# Altium PCB PCB2.PcbDoc
Units mm, origin at the board's own origin, x right, y up, seen from the top; angles counter-clockwise.
Board outline 25 x 13.8 mm, 2 copper layers (Top Layer, Bottom Layer); 27 components, 24 nets, 92 pads, 0 vias.
Unrouted connection lines stored in the file: 4.
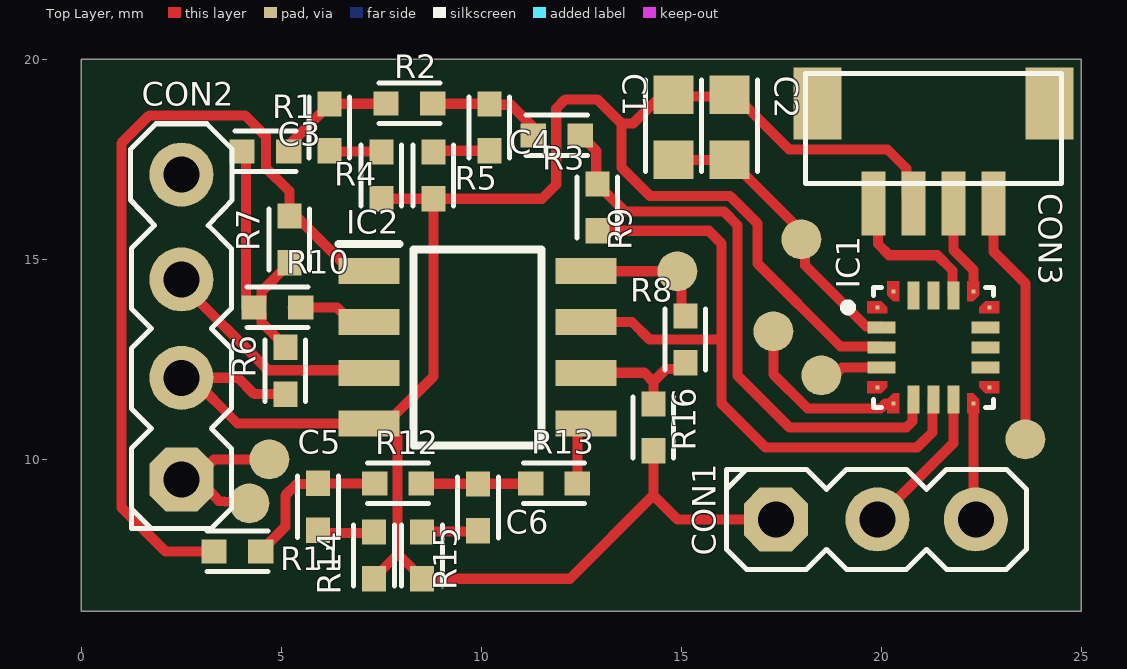
[diagram p0: Top Layer view]
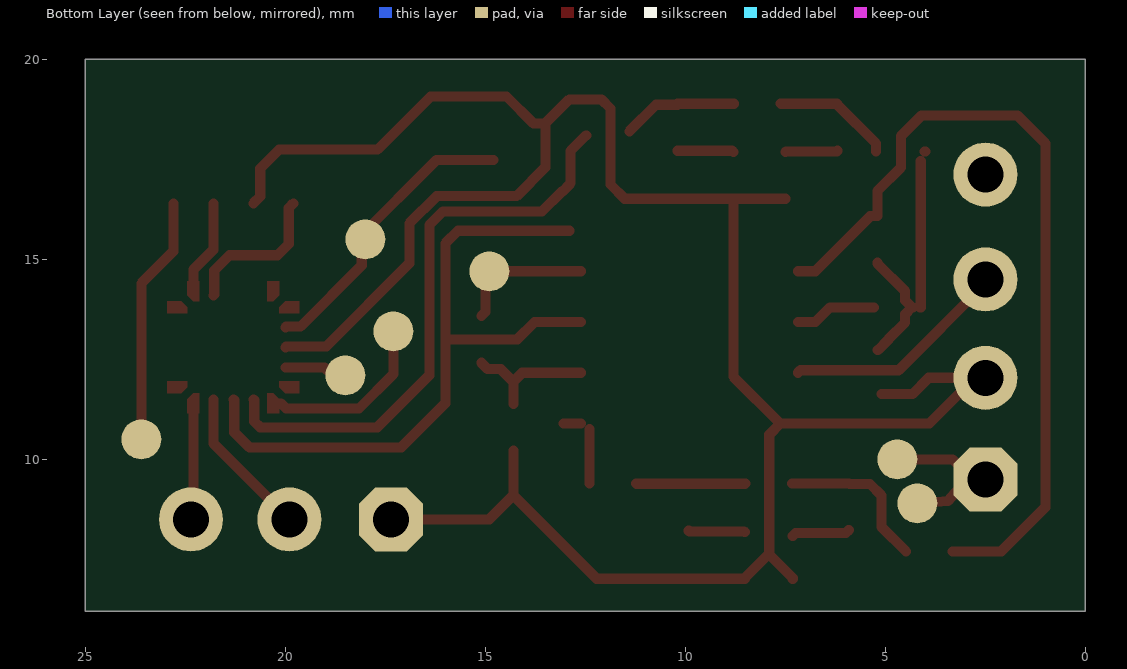
[diagram p1: Bottom Layer view, seen from below]
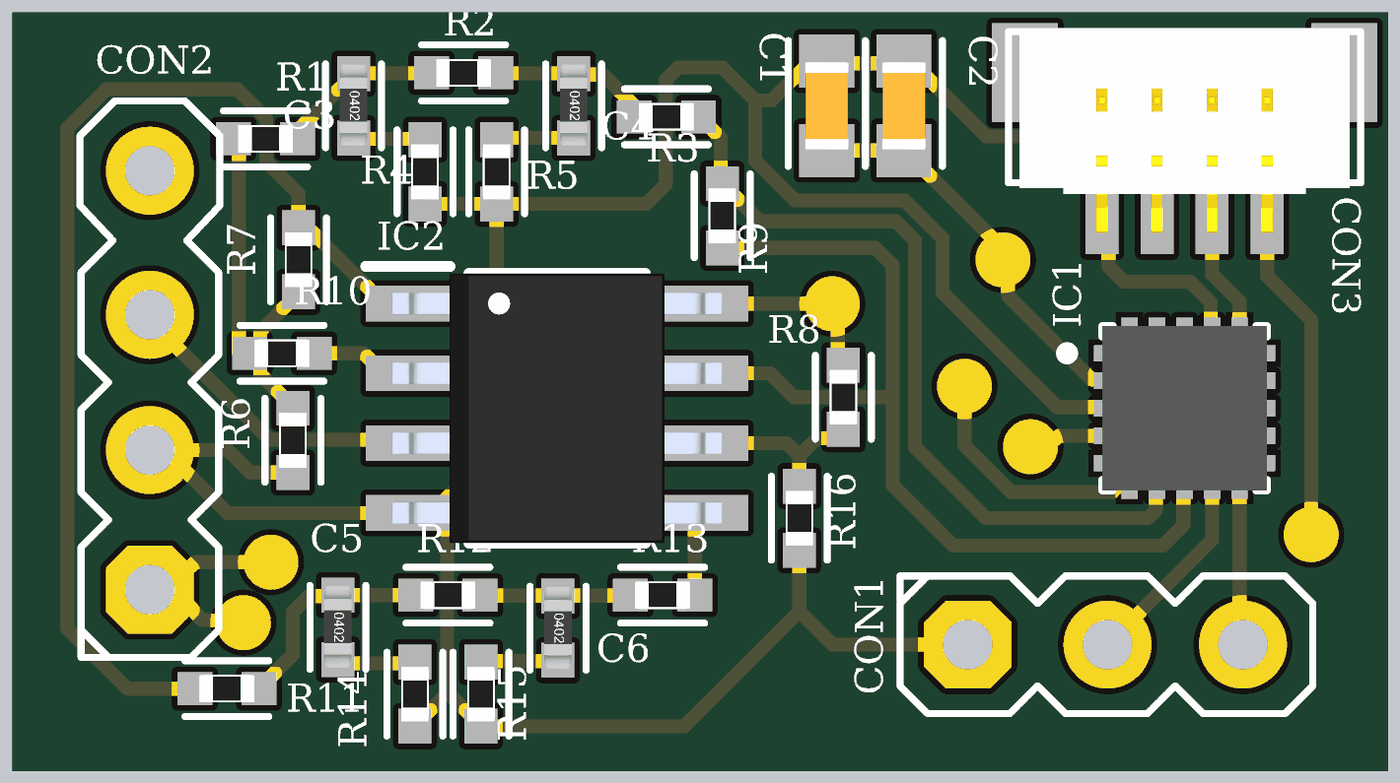
[diagram p2: 3D render of the assembled board from above, using the file's embedded part models]

## Layer stack, top to bottom
Top Solder: solder mask 0.0102, Solder Resist, Dk 3.5
Top Layer: signal copper 0.0356
Dielectric 1: dielectric 0.32, FR-4, Dk 4.8
Bottom Layer: signal copper 0.0356
Bottom Solder: solder mask 0.0102, Solder Resist, Dk 3.5

## Board outline
0,20 0,6.2 25,6.2 25,20

## Design rules (kind name [scope] priority, off if disabled: settings)
BoardOutlineClearance [All] p1: gap=0.8 ignorepadtopadclearanceinfootprint=FALSE
Clearance [All] p1: gap=0.127 ignorepadtopadclearanceinfootprint=TRUE except(0.2: Arc-THPad Track-THPad SMDPad-THPad; 0.254: THPad-Fill THPad-Poly THPad-Region Via-Fill Via-Poly Via-Region; 0.33: Arc-Hole Track-Hole SMDPad-Hole THPad-Hole Via-Hole Fill-Hole Poly-Hole Region-Hole; 0.5: THPad-THPad)
HoleSize [All] p1: absolutevalues=TRUE maxlimit=4 minlimit=0.02 maxpercent=80.000 minpercent=20.000
HoleToHoleClearance [All] p1: gap=0.127 allowstackedmicrovias=TRUE
PlaneClearance [All] p1: clearance=0.3
PlaneConnect PlaneConnect_1 [(HasFootprint('R 2512'))] p1: planeconnectstyle=Relief reliefexpansion=0.508 reliefentries=4 reliefconductorwidth=0.254 reliefairgap=0.254
PlaneConnect [All] p2: planeconnectstyle=Relief reliefexpansion=0.508 reliefentries=4 reliefconductorwidth=0.254 reliefairgap=0.254
PolygonConnect "Polygon Power Connection" [(HasFootprint('DFN 5x6')) OR  (HasFootprint('R 2512')) OR  IsVia OR  HasFootprint('SMD PAD')  OR  (HasFootprint('DJNR60454R5FERROCORE'))  OR  (HasFootprint ('SON50P200X200X80-9N-D')) OR (HasFootprint('SOT230P700X180-4N'))  OR    InNetClass('Power')] p1: connectstyle=Direct reliefconductorwidth=0.254 reliefentries=4 polygonreliefangle="90 Angle" airgapwidth=0.254 // Conection to high power components
PolygonConnect [All] p2: connectstyle=Relief reliefconductorwidth=0.254 reliefentries=4 polygonreliefangle="90 Angle" airgapwidth=0.254
RoutingVias [All] p1: holewidth=0.3 width=0.5 viastyle="Through Hole" minholewidth=0.2 minwidth=0.3 maxholewidth=1 maxwidth=1.27
SilkToSilkClearance [All] p1: silktosilkclearance=0.127
SolderMaskExpansion "Tented Vias" [IsVia] p1: expansion=0.102 istentingtop=TRUE
SolderMaskExpansion [All] p2: expansion=0.102 istentingtop=FALSE
Width [All] p1: maxlimit=1 minlimit=0.127 preferedwidth=0.3 minimp=50.000000 maximp=50.000000 favimp=50.000000
25 further rules are at their usual default settings.

## Classes and differential pairs
component class main: C1 C2 CON1 CON2 CON3 IC1
component class ADC: C3 C4 C5 C6 IC2 R1 R2 R3 R4 R5 R6 R7 R8 R9 R10 R11 R12 R13 R14 R15 R16

## Components (designator, comment, footprint, x,y, rotation, side; value= is the part's Value field where it differs from the comment)
C1 "100nF" "C 0603" 14.8,18.3 r90 top
C2 "4.7uF" "C 0603" 16.2,18.3 r90 top
C3 "opr" "C 0402" 6.2,18.3 r270 top
C4 "10uf" "C 0402" 10.2,18.3 r270 top
C5 "10uf" "C 0402" 5.916,8.816 r270 top
C6 "opt" "C 0402" 9.916,8.8 r270 top
CON1 "3 Pin" "Goldpin 2.54 3P" 19.9,8.5 r0 top
CON2 "4 PIN" "Goldpin 2.54 4P" 2.5,13.31 r90 top
CON3 "4 PIN" BM04B-SRSS-TB 21.3,17.9 r0 top
IC1 "STM32C011" 20-UFQFPN 21.3,12.8 r0 top
IC2 "TLV2462CD" SOIC127P600X175-8N 9.9,12.8 r0 top
R1 "0" "R 0402" 4.6,17.7 r180 top
R2 "0" "R 0402" 8.2,18.9 r180 top
R3 "330" "R 0402" 11.884,18.1 r180 top
R4 "opt" "R 0402" 7.5,17.1 r270 top
R5 "0" "R 0402" 8.8,17.1 r270 top
R6 "100k" "R 0402" 5.1,12.216 r270 top
R7 "100k" "R 0402" 5.2,15.5 r270 top
R8 "100k" "R 0402" 15.1,13 r270 top
R9 "1k" "R 0402" 12.9,16.3 r270 top
R10 "0" "R 0402" 4.9,13.8 r0 top
R11 "330" "R 0402" 3.9,7.7 r180 top
R12 "0" "R 0402" 7.916,9.4 r180 top
R13 "0" "R 0402" 11.816,9.4 r180 top
R14 "opt" "R 0402" 7.316,7.6 r270 top
R15 "0" "R 0402" 8.516,7.6 r270 top
R16 "100k" "R 0402" 14.3,10.8 r270 top

## Footprints (in the part's own frame and the unit in brackets; to place one, negate y for a bottom-side part, rotate by r counter-clockwise, add the part's x,y. Pads: shape width x height; smd on the part's side, far side on the other; paste and mask are expansions set on the pad)
20-UFQFPN [mm]
  rect 0.1x0.1 smd paste-1 mask+0: 1(-1.4,1) 5(-1.4,-1) 6(-1,-1.4) 10(1,-1.4) 11(1.4,-1) 15(1.4,1) 16(1,1.4) 20(-1,1.4)
  rect 0.7x0.3 smd: 2(-1.3,0.5) 3(-1.3,0) 4(-1.3,-0.5) 12(1.3,-0.5) 13(1.3,0) 14(1.3,0.5)
  rect 0.3x0.7 smd: 7(-0.5,-1.3) 8(0,-1.3) 9(0.5,-1.3) 17(0.5,1.3) 18(0,1.3) 19(-0.5,1.3)
  Top Layer region: 1.65,-1.15 1.3,-1.15 1.15,-1 1.15,-0.85 1.65,-0.85
  Top Layer region: -0.85,-1.65 -1.15,-1.65 -1.15,-1.3 -1,-1.15 -0.85,-1.15
  Top Layer region: -1.15,1 -1.15,0.85 -1.65,0.85 -1.65,1.15 -1.3,1.15
  Top Layer region: 1.15,1.3 1,1.15 0.85,1.15 0.85,1.65 1.15,1.65
  Top Layer region: -0.85,1.15 -1,1.15 -1.15,1.3 -1.15,1.65 -0.85,1.65
  Top Layer region: 1.15,-1.3 1.15,-1.65 0.85,-1.65 0.85,-1.15 1,-1.15
  Top Layer region: 1.65,0.85 1.15,0.85 1.15,1 1.3,1.15 1.65,1.15
  Top Layer region: -1.15,-1 -1.3,-1.15 -1.65,-1.15 -1.65,-0.85 -1.15,-0.85
  silkscreen extent -2.23,-1.5 1.5,1.5, body extent -1.5,-1.5 1.5,1.5, height 0.6
BM04B-SRSS-TB [mm]
  rect 0.6x1.6 smd: 1(-1.5,-1.5) 2(-0.5,-1.5) 3(0.5,-1.5) 4(1.5,-1.5)
  rect 1.2x1.8 smd: A(-2.9,1) B(2.9,1)
  silkscreen extent -3.2,-1 3.2,1.75, body extent -3,-1.9 3,1.7, height 4.25
"C 0402" [mm] "MLCC Capacitor 0402"
  rect 0.635x0.6 smd: 1(-0.584,0) 2(0.584,0)
  silkscreen extent -0.76,-0.51 0.76,0.51, body extent -0.76,-0.25 0.74,0.25, height 0.35
"C 0603" [mil]
  rect 38x39.37 smd: 1(-32,0) 2(32,0)
  silkscreen extent -43,-28 47,28, body extent -31,-16 31,16, height 24
"Goldpin 2.54 3P" [mm]
  oct 1.6x1.6 hole 0.9: 1(-2.54,0)
  round 1.6 hole 0.9: 2(0,0) 3(2.46,0)
  silkscreen extent -3.77,-1.25 3.73,1.25
"Goldpin 2.54 4P" [mm]
  oct 1.6x1.6 hole 0.9: 1(-3.81,0)
  round 1.6 hole 0.9: 2(-1.27,0) 3(1.19,0) 4(3.81,0)
  silkscreen extent -5.04,-1.27 5.08,1.27
"R 0402" [mm] "0402 resistor Chip"
  rect 0.635x0.6 smd: 1(-0.584,0) 2(0.584,0)
  silkscreen extent -0.76,-0.51 0.76,0.51, body extent -0.5,-0.25 0.5,0.25, height 0.31
SOIC127P600X175-8N [mm]
  rect 1.525x0.65 smd: 1(-2.712,1.905) 2(-2.712,0.635) 3(-2.712,-0.635) 4(-2.712,-1.905) 5(2.712,-1.905) 6(2.712,-0.635) 7(2.712,0.635) 8(2.712,1.905)
  silkscreen extent -3.47,-2.45 1.6,2.58, body extent -3,-2.45 3,2.45, height 1.5

## Part data
C1 C2 C3 C4 C5 C6: library part Capacitor, "MLCC Capacitor"
IC1: library part STM32C011F4U, "UFQFPN 20"
IC2: "Integrated Circuit", Manufacturer_Name="Texas Instruments", Mouser Part Number=595-TLV2462CD, Arrow Part Number=TLV2462CD, Arrow Price/Stock=https://www.arrow.com/en/products/tlv2462cd/texas-instruments?region=nac, Datasheet Link=http://www.ti.com/lit/ds/symlink/tlv2462.pdf, Height=1.75mm, Manufacturer_Part_Number=TLV2462CD, Mouser Price/Stock=https://www.mouser.co.uk/ProductDetail/Texas-Instruments/TLV2462CD?qs=ZA235jQDfbpG9ihY0Sx8Cg%3D%3D
R1 R2 R3 R4 R5 R6 R7 R8 R9 R10 R11 R12 R13 R14 R15 R16: library part Resistor, "General pourpouse resistor"

## Free pads (board coordinates)
  round 1 all layers, no hole: 3(4.2,8.9) 3(4.7,10) 3(14.9,14.7) 3(17.3,13.2) 3(18,15.5) 3(18.5,12.1) 4(23.6,10.5)

## Nets (pads, with @x,y where several pads share a name; then routed paths per layer and width w, separated by ;. In a path a pad name is that pad's centre, name@x,y a point inside that pad or via, vN(x,y) a via of type N, cw(c..) or ccw(c..) an arc to the next point about the centre after c; other vN are vias at no path point)
3.3V: C1.1 C2.1 CON2.1 IC1.2 IC2.8 pad.3@4.2,8.9 pad.3@4.7,10 pad.3@14.9,14.7 pad.3@18,15.5 R8.1 | length 15.3
  Top Layer w0.254: pad.3@4.2,8.9 3.434,8.957 3.06,9.391 2.986,9.464 2.892,9.471 CON2.1 2.822,9.5 3.322,10 pad.3@4.7,10 ; IC2.8 12.615,14.703 14.898,14.703 14.9,14.7 15,14.6 15,13.684 R8.1 ; C1.1 C2.1 16.217,17.487 pad.3@18.197,15.508 ; pad.3@18,15.5 18.089,15.411 18.089,14.851 19.618,13.323 19.977,13.323 IC1.2
A_NEG_IN_1: IC2.2 R10.2 | length 2.1
  Top Layer w0.254: R10.2@5.284,13.8 6.385,13.8 6.75,13.435 IC2.2
A_NEG_IN_2: IC2.6 R8.2 R16.1 | length 3.3
  Top Layer w0.254: IC2.6 14.079,12.165 14.3,11.944 ; R16.1 14.3,11.944 ; R8.2 14.94,12.256 14.612,12.256 14.3,11.944
A_OUT_1: IC2.1 R7.1 R11.2 | length 20.8
  Top Layer w0.254: R11.2 2.1,7.7 1,8.8 1,17.9 1.7,18.6 4.093,18.6 4.613,18.08 4.613,17.295 5.2,16.707 R7.1 R7.1@5.387,16.084 ; R7.1@5.387,16.068 6.75,14.705 IC2.1
A_OUT_2: IC1.8 IC2.7 R9.2 | length 17.5
  Top Layer w0.254: IC2.7 13.765,13.435 14.2,13 16,13 ; R9.2 15.684,15.716 16,15.4 16,13 ; IC1.8 21.277,11.477 21.277,10.677 20.9,10.3 17.1,10.3 16,11.4 16,13
A_POS_IN_1: CON2.3 IC2.3 | length 5.7
  Top Layer w0.254: CON2.3 2.5,14.398 4.669,12.228 7.124,12.228 IC2.3
A_POS_IN_2: IC2.5 R13.1 | length 1.8
  Top Layer w0.254: R13.1 IC2.5@12.4,10.76 ; IC2.5 IC2.5@13.05,10.895
GND: C1.2 C2.2 CON1.1 CON2.2 CON3.2 IC1.3 IC2.4 R4.2 R5.2 R6.2 R14.2 R15.2 R16.2 | length 57.9
  Top Layer w0.254: CON2.2 CON2.2@2.76,12.04 ; R6.2 4.324,11.632 3.915,12.04 CON2.2@2.76,12.04 ; R14.2 7.316,7.033 7.903,7.621 ; R4.2 R5.2 ; R16.2 14.3,9.1 ; CON1.1 14.9,8.5 14.3,9.1 ; IC1.3 19.977,12.823 18.977,12.823 16.9,14.9 16.9,15.9 16.219,16.581 14.219,16.581 13.5,17.3 13.5,18.4 ; CON3.2 20.627,16.573 20.627,17.273 20.154,17.746 17.695,17.746 16.368,19.073 14.473,19.073 13.8,18.4 13.5,18.4 ; CON2.2@2.76,12.04 3.905,10.895 IC2.4 IC2.4@7.625,10.895 ; IC2.4@7.625,10.895 8.8,12.069 R5.2 ; IC2.4@7.625,10.895 7.903,10.617 7.903,7.621 ; 7.903,7.621 7.929,7.621 8.516,7.033 R15.2 12.216,7.016 14.3,9.1 ; R5.2 11.516,16.516 11.872,16.872 11.872,18.771 12.1,19 12.9,19 13.5,18.4
NetC3_1: C3.1 R1.1 R2.2 | length 3
  Top Layer w0.254: R1.1@5.233,17.7 5.233,17.9 6.2,18.867 C3.1 6.208,18.892 7.608,18.892 R2.2
NetC3_2: C3.2 R4.1 | length 1.3
  Top Layer w0.254: C3.2 6.216,17.7 7.484,17.7 R4.1
NetC4_1: C4.1 R2.1 R3.2 | length 2.9
  Top Layer w0.254: R2.1 8.792,18.892 10.192,18.892 C4.1 ; C4.1@10.2,18.867 10.733,18.867 R3.2@11.4,18.2
NetC4_2: C4.2 R5.1 | length 1.4
  Top Layer w0.254: R5.1 8.832,17.716 C4.2
NetC5_1: C5.1 R11.1 R12.2 | length 4
  Top Layer w0.254: R11.1 5.1,8.316 5.1,9.1 5.384,9.384 5.899,9.384 C5.1 R12.2
NetC5_2: C5.2 R14.1 | length 1.5
  Top Layer w0.254: C5.2 5.989,8.158 7.242,8.158 R14.1@7.316,8.084
NetC6_1: C6.1 R12.1 R13.2 | length 2.7
  Top Layer w0.254: R12.1 8.508,9.392 9.908,9.392 C6.1 9.924,9.392 11.224,9.392 R13.2
NetC6_2: C6.2 R15.1 | length 1.4
  Top Layer w0.254: R15.1 8.532,8.2 9.9,8.2 C6.2
NetCON1_2: CON1.2 IC1.9 | length 3.8
  Top Layer w0.254: CON1.2 21.8,10.4 IC1.9
NetCON1_3: CON1.3 IC1.10 | length 2.9
  Top Layer w0.254: IC1.10 22.3,8.56 CON1.3
NetCON2_4: CON2.4 IC1.6 pad.3@17.3,13.2 | length 4.5
  Top Layer w0.254: pad.3@17.3,13.2 17.3,12.13 18.157,11.273 19.982,11.273 20.109,11.4 IC1.6
NetIC1_7: IC1.7 R3.1 R9.1 | length 14.6
  Top Layer w0.254: R3.1 12.486,18.1 12.873,17.713 12.873,16.911 R9.1 12.9,16.867 13.073,16.694 13.09,16.694 13.584,16.2 16.061,16.2 16.4,15.861 16.4,12.1 17.7,10.8 20.628,10.8 20.777,10.949 20.777,11.477 IC1.7
NetR1_2: R1.2 R6.1 R7.2 R10.1 | length 6.5
  Top Layer w0.254: R1.2@3.998,17.7 R1.2 ; R1.2@4.116,17.458 4.116,13.8 R10.1@4.127,13.8 ; R10.1 4.333,13.8 4.506,13.973 4.506,14.205 5.2,14.898 R7.2 ; R10.1@4.432,13.701 4.506,13.627 4.506,13.421 4.927,13 4.927,12.99 5.181,12.736 R6.1@5.191,12.736
RESET: CON3.4 IC1.4 pad.3@18.5,12.1 pad.4 | length 7.8
  Top Layer w0.254: pad.3@18.5,12.1 18.643,12.243 18.965,12.243 19.022,12.3 IC1.4 ; CON3.4 22.8,15.2 23.6,14.4 pad.4
SWCLK: CON3.1 IC1.17 | length 3.8
  Top Layer w0.254: CON3.1 19.915,16.285 19.915,15.385 20.195,15.105 21.395,15.105 21.777,14.723 21.777,14.123 IC1.17
SWDIO: CON3.3 IC1.16 | length 2.4
  Top Layer w0.254: CON3.3 21.8,15.239 22.3,14.739 IC1.16
pads on no net: CON3.A CON3.B IC1.1 IC1.5 IC1.11 IC1.12 IC1.13 IC1.14 IC1.15 IC1.18 IC1.19 IC1.20

## Polygon pours and split planes (outlines as drawn)
no net on Layer0 "Default Coverlay 1 Top" (split plane): 0,0 0,20 25,20 25,0
no net on Layer0 "Default Coverlay 1 Bottom" (split plane): 0,0 0,20 25,20 25,0